# Altium PCB PCB1.PcbDoc
Units mil, origin at the board's own origin, x right, y up, seen from the top; angles counter-clockwise.
Board outline 1885.03 x 1755.03 mil, 2 copper layers (Top Layer, Bottom Layer); 24 components, 59 nets, 170 pads, 23 vias.
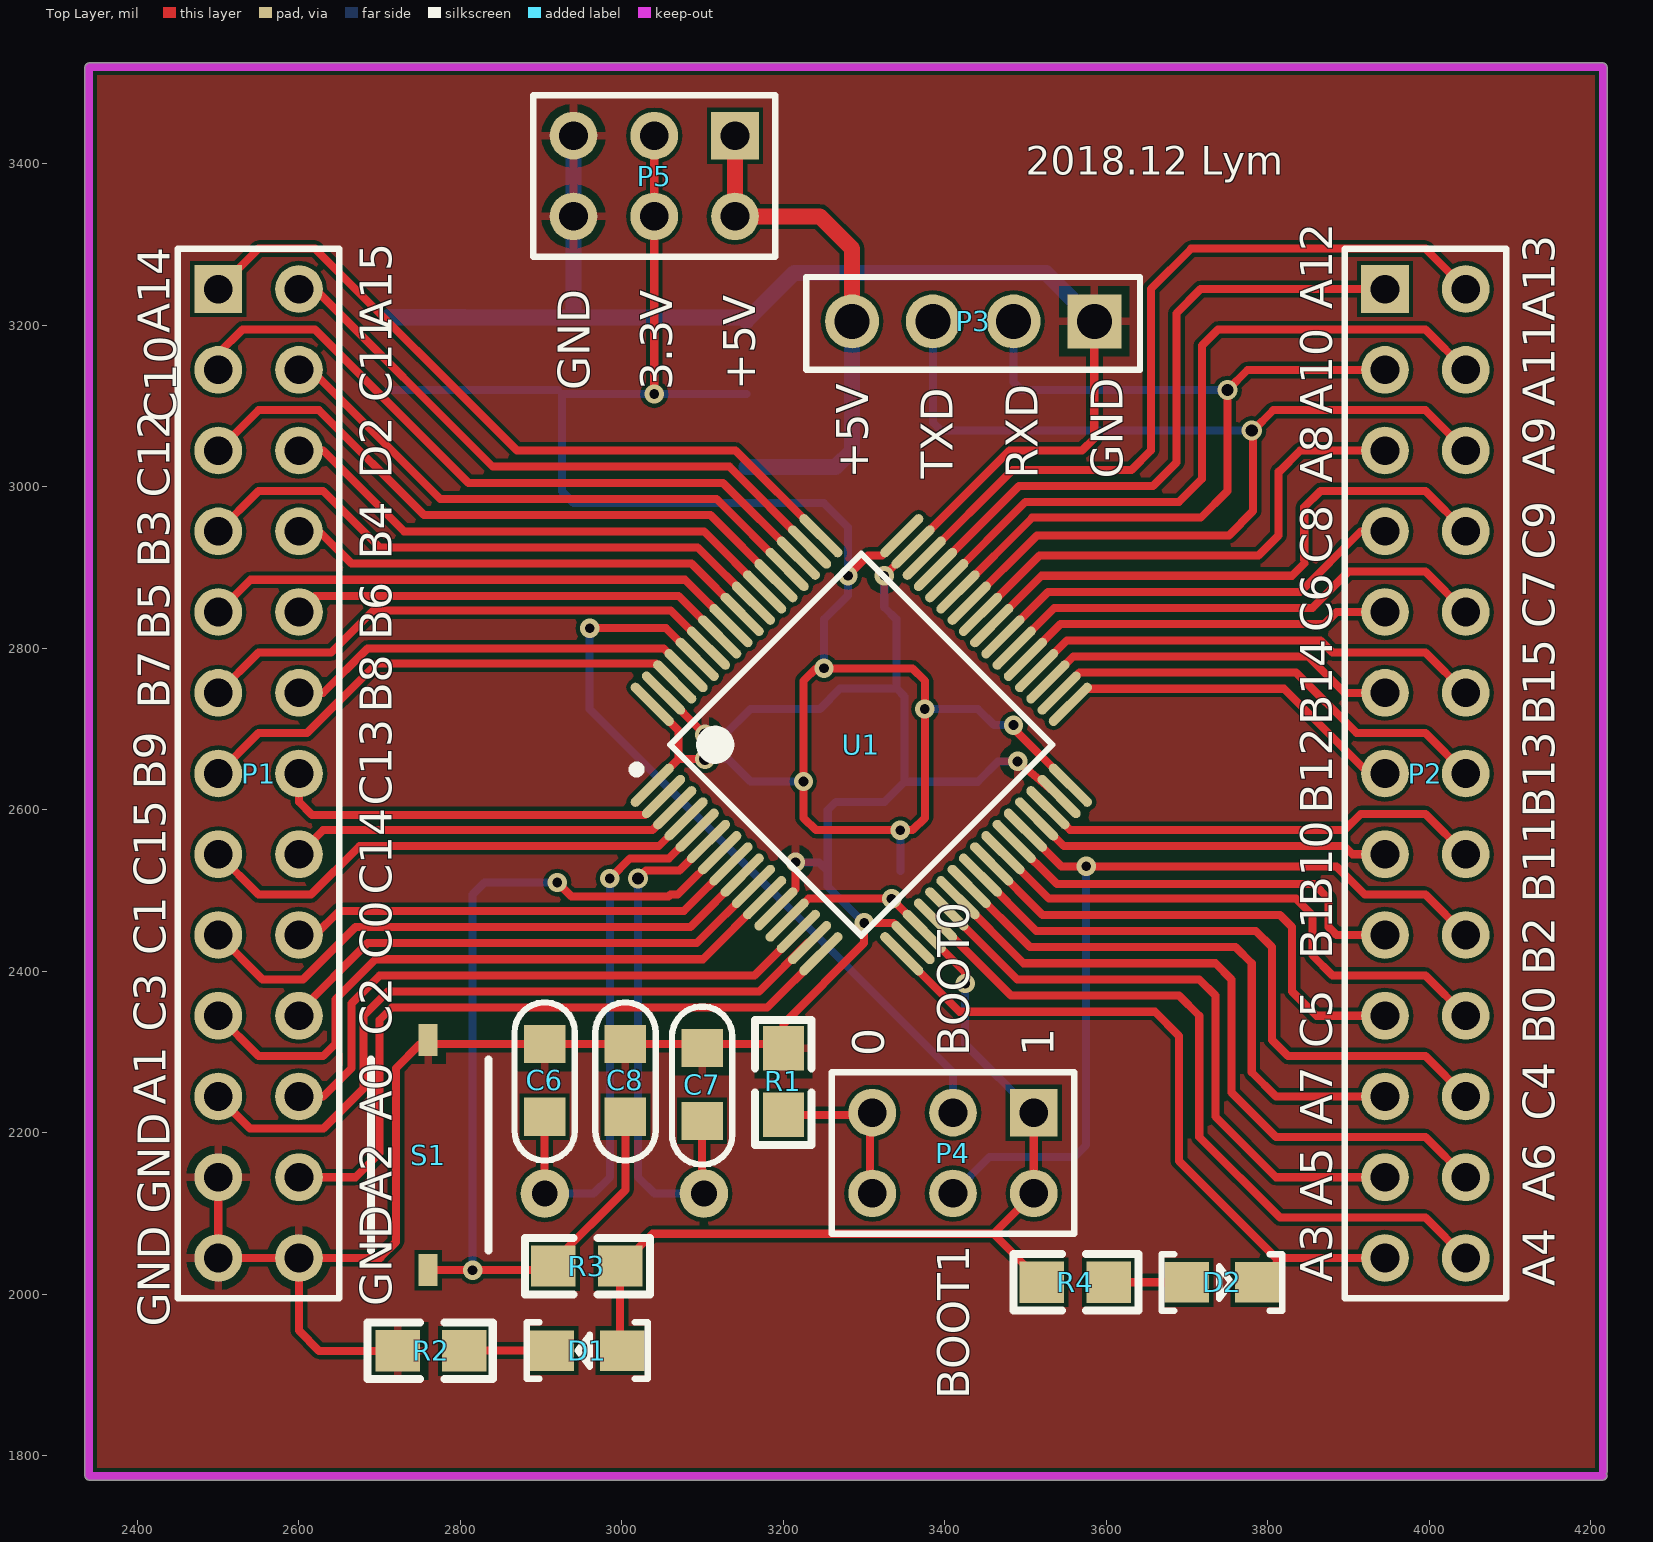
[diagram p0: Top Layer view]
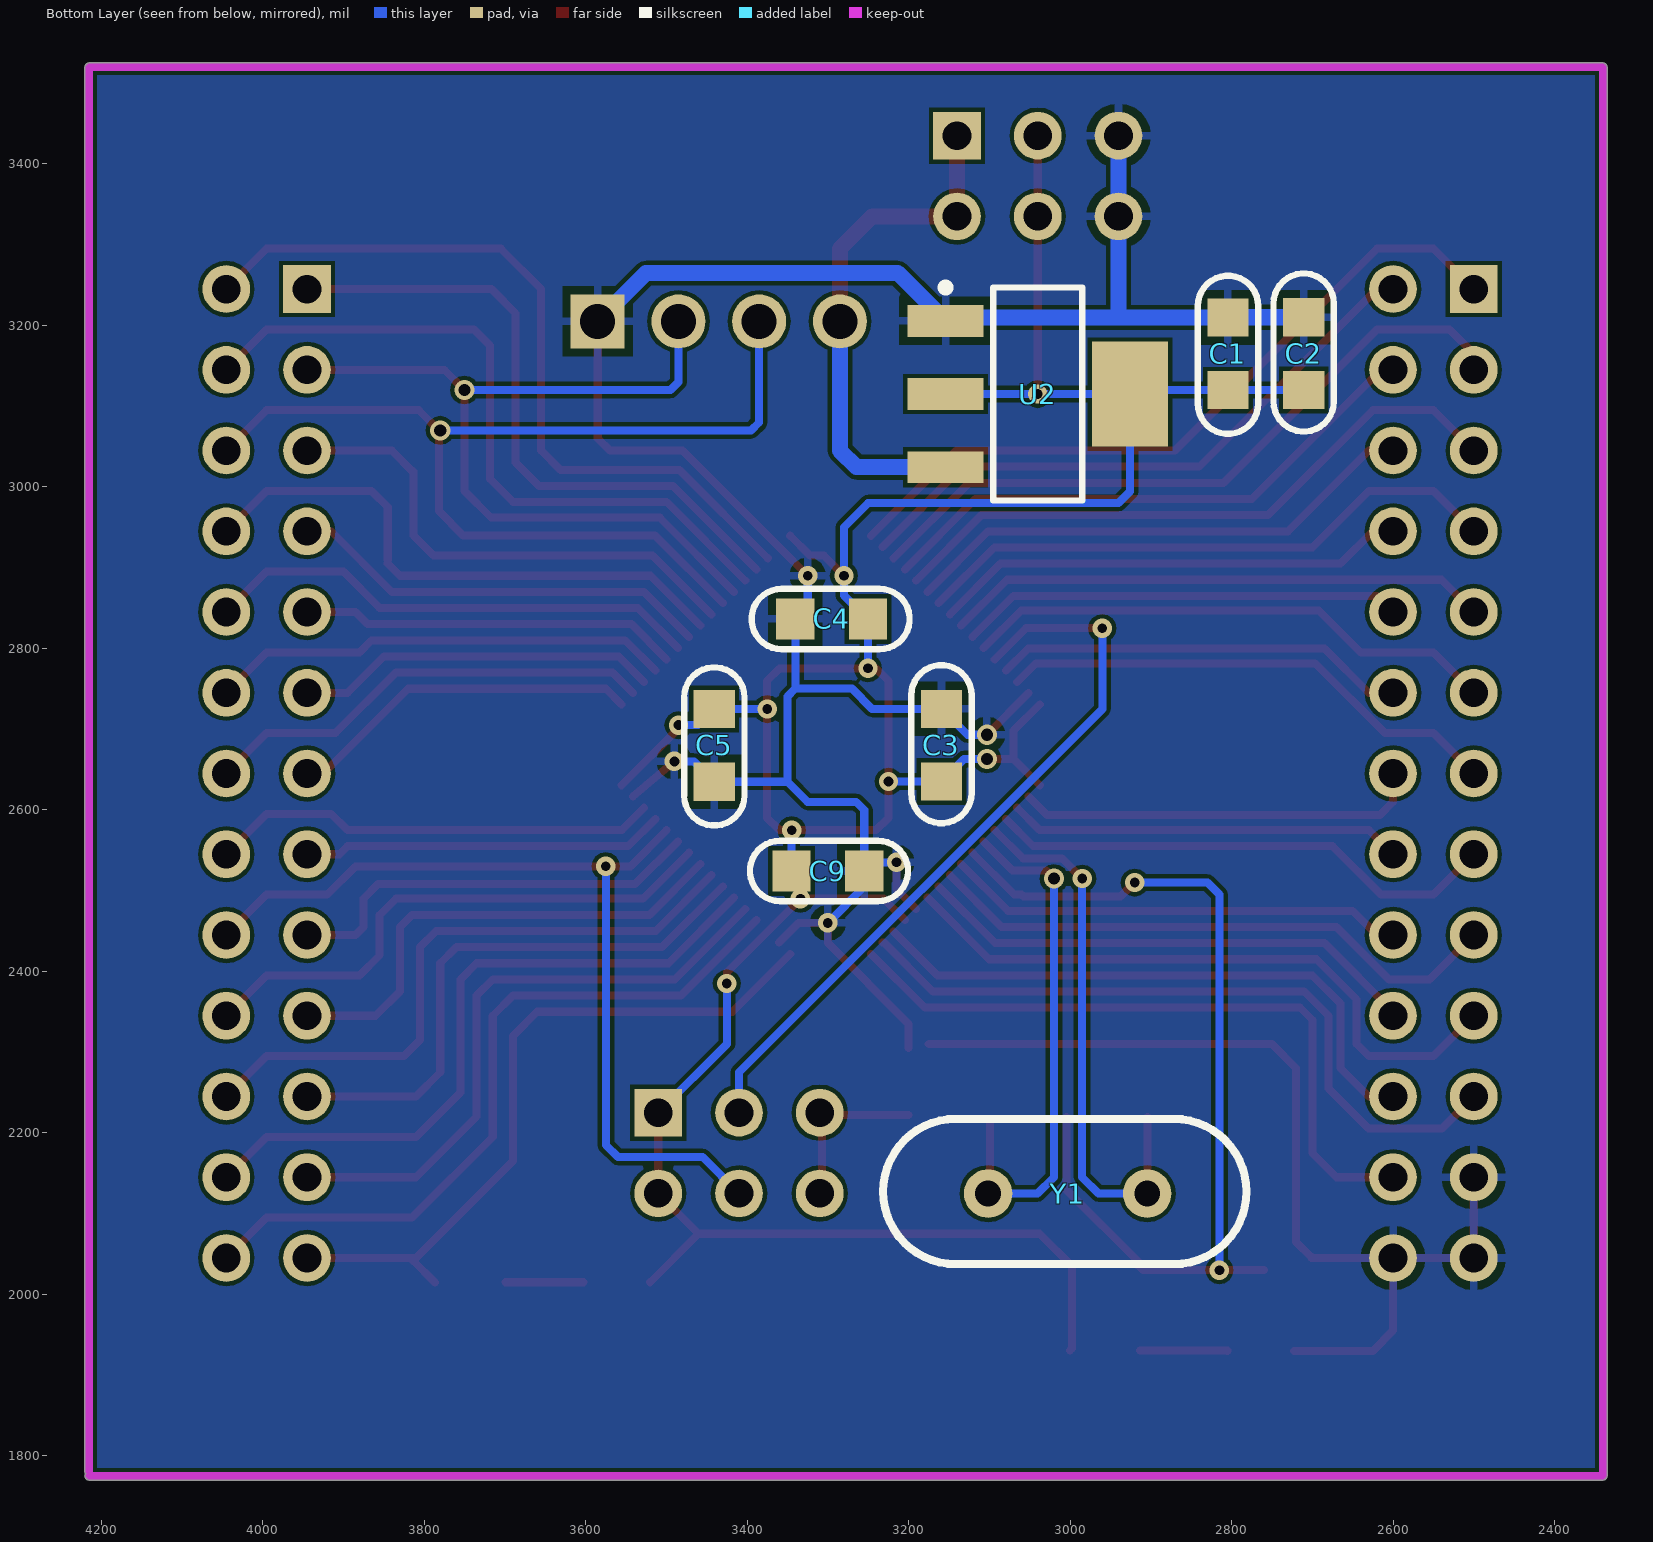
[diagram p1: Bottom Layer view, seen from below]

## Layer stack, top to bottom
Top Solder: solder mask 0.4, Solder Resist, Dk 3.5
Top Layer: signal copper 1.4
Dielectric 1: dielectric 12.6, FR-4, Dk 4.8
Bottom Layer: signal copper 1.4
Bottom Solder: solder mask 0.4, Solder Resist, Dk 3.5

## Board outline
2334.99,1775 ccw(c2340,1775) 2340,1769.98 4215,1769.98 ccw(c4215,1775) 4220.02,1775 ccw(c4215,1775) 4219.35,1777.5 ccw(c4215,1780) 4220.02,1780 4220.02,3520 ccw(c4215,3520) 4215,3525.01 2340,3525.01 ccw(c2340,3520) 2334.99,3520

## Design rules (kind name [scope] priority, off if disabled: settings)
Clearance [All] p1: gap=5 ignorepadtopadclearanceinfootprint=FALSE except(0: Arc-Hole Track-Hole SMDPad-Hole THPad-Hole Via-Hole Fill-Hole Poly-Hole Region-Hole Text-Hole)
PolygonConnect [All] p1: connectstyle=Relief reliefconductorwidth=10 reliefentries=4 polygonreliefangle="90 Angle" airgapwidth=10
RoutingVias [All] p1: holewidth=15 width=25 viastyle="Through Hole" minholewidth=10 minwidth=20 maxholewidth=20 maxwidth=30
SolderMaskExpansion [All] p1: expansion=4
Width [All] p1: maxlimit=20 minlimit=10 preferedwidth=10
30 further rules are at their usual default settings.

## Components (designator, comment, footprint, x,y, rotation, side; value= is the part's Value field where it differs from the comment)
C1 "10uF" 0805C 2803.73,3120 r180 bottom
C2 "0.1UF" 0805C 2711.27,3210 r0 bottom
C3 "0.1UF" 0805C 3160,2725 r0 bottom
C4 "0.1UF" 0805C 3340.14,2835.73 r270 bottom
C5 "0.1UF" 0805C 3440,2635 r180 bottom
C6 "22PF" 0805C 2905,2220 r0 top
C7 "22PF" 0805C 3100,2215 r0 top
C8 "0.1UF" 0805C 3005,2220 r0 top
C9 "0.1UF" 0805C 3255,2525 r90 bottom
D1 "LED" LED0805 3000,1930 r180 top
D2 "LED" LED0805 3700,2015 r0 top
P1 "Header 13X2" HDR2X13 2500,3245 r270 top
P2 "Header 13X2" HDR2X13 3945,3245 r270 top
P3 "Header 4X1" HDR1X4 3435,3205 r180 top
P4 "Header 3X2" HDR2X3 3510,2225 r180 top
P5 "Header 3X2" HDR2X3 3140,3435 r180 top
R1 "1K" 0805R 3200,2305 r270 top
R2 "1K" 0805R 2805,1930 r180 top
R3 "10K" 0805R 2915,2035 r0 top
R4 "1K" 0805R 3520,2015 r0 top
S1 "KEY" KEY_SOP_3X6X2.2MM 2760,2015 r90 top
U1 "STM32F103RBT6_1" STM-LQFP64_N 3296.46,2680.61 r45 top
U2 "REG1117_3.3" SOT223_N 3040,3115 r180 bottom
Y1 "8M" OSC2PR-1 2905,2125 r0 bottom

## Footprints (in the part's own frame and the unit in brackets; to place one, negate y for a bottom-side part, rotate by r counter-clockwise, add the part's x,y. Pads: shape width x height; smd on the part's side, far side on the other; paste and mask are expansions set on the pad)
0805C [mm]
  rect 1.3x1.2 smd: 1(-0.019,-0.004) 2(-0.019,2.282)
  silkscreen extent -0.97,-1.38 0.93,3.59
0805R [mm]
  rect 1.4x1.3 smd: 1(0,0) 2(2.1,0)
  silkscreen extent -0.89,-0.89 3.05,0.89
HDR1X4 [mm] "TO, Thru-Hole, Vertical, Heatsink Mounted; 4 In-Line Leads; Pitch 2.54 mm"
  rect 1.7x1.7 hole 1.1: 1(-3.81,0)
  round 1.7 hole 1.1: 2(-1.27,0) 3(1.27,0) 4(3.81,0)
  silkscreen extent -5.25,-1.4 5.25,1.52
HDR2X3 [mm] "Connector; Header; 3x2 Position"
  rect 1.5x1.5 hole 0.9: 1(0,0)
  round 1.5 hole 0.9: 2(0,2.54) 3(2.54,0) 4(2.54,2.54) 5(5.08,0) 6(5.08,2.54)
  silkscreen extent -1.27,-1.27 6.35,3.81
HDR2X13 [mm]
  rect 1.5x1.5 hole 0.9: 1(0,0)
  round 1.5 hole 0.9: 2(0,2.54) 3(2.54,0) 4(2.54,2.54) 5(5.08,0) 6(5.08,2.54) 7(7.62,0) 8(7.62,2.54) 9(10.16,0) 10(10.16,2.54) 11(12.7,0) 12(12.7,2.54) 13(15.24,0) 14(15.24,2.54) 15(17.78,0) 16(17.78,2.54) 17(20.32,0) 18(20.32,2.54) 19(22.86,0) 20(22.86,2.54) 21(25.4,0) 22(25.4,2.54) 23(27.94,0) 24(27.94,2.54) 25(30.48,0) 26(30.48,2.54)
  silkscreen extent -1.27,-1.27 31.75,3.81
KEY_SOP_3X6X2.2MM [mm]
  rect 1x0.6 smd: 1(0.381,0) 2(7.62,0)
  silkscreen extent 1,-1.9 7,1.8
LED0805 [mm]
  rect 1.4x1.27 smd: 1(-0.008,-0.007) 2(2.202,-0.007)
  silkscreen extent -0.81,-0.9 2.99,0.88
OSC2PR-1 [mil]
  round 60 hole 32: 1(-0.55,0.16) 2(196.45,0.16)
  silkscreen extent -124,-92 326,88
SOT223_N [mm] "SOT223, 4-Leads, Body 6.5x3.5mm, Pitch 2.3mm, Lead Span 7mm, IPC Medium Density"
  rect 2.4x1 smd: 1(-2.9,2.3) 2(-2.9,0) 3(-2.9,-2.3)
  rect 2.4x3.3 smd: 4(2.9,0)
  silkscreen extent -3.03,-3.35 1.4,3.47, body extent -1.85,-3.35 1.85,3.35, height 1.7
STM-LQFP64_N [mm] "Thin QFP, 64-Leads, Body 10x10mm, Pitch 0.5mm, IPC Medium Density"
  oval 1.8x0.3 smd: 1(-5.55,3.75) 2(-5.55,3.25) 3(-5.55,2.75) 4(-5.55,2.25) 5(-5.55,1.75) 6(-5.55,1.25) 7(-5.55,0.75) 8(-5.55,0.25) 9(-5.55,-0.25) 10(-5.55,-0.75) 11(-5.55,-1.25) 12(-5.55,-1.75) 13(-5.55,-2.25) 14(-5.55,-2.75) 15(-5.55,-3.25) 16(-5.55,-3.75) 33(5.55,-3.75) 34(5.55,-3.25) 35(5.55,-2.75) 36(5.55,-2.25) 37(5.55,-1.75) 38(5.55,-1.25) 39(5.55,-0.75) 40(5.55,-0.25) 41(5.55,0.25) 42(5.55,0.75) 43(5.55,1.25) 44(5.55,1.75) 45(5.55,2.25) 46(5.55,2.75) 47(5.55,3.25) 48(5.55,3.75)
  oval 0.3x1.8 smd: 17(-3.75,-5.55) 18(-3.25,-5.55) 19(-2.75,-5.55) 20(-2.25,-5.55) 21(-1.75,-5.55) 22(-1.25,-5.55) 23(-0.75,-5.55) 24(-0.25,-5.55) 25(0.25,-5.55) 26(0.75,-5.55) 27(1.25,-5.55) 28(1.75,-5.55) 29(2.25,-5.55) 30(2.75,-5.55) 31(3.25,-5.55) 32(3.75,-5.55) 49(3.75,5.55) 50(3.25,5.55) 51(2.75,5.55) 52(2.25,5.55) 53(1.75,5.55) 54(1.25,5.55) 55(0.75,5.55) 56(0.25,5.55) 57(-0.25,5.55) 58(-0.75,5.55) 59(-1.25,5.55) 60(-1.75,5.55) 61(-2.25,5.55) 62(-2.75,5.55) 63(-3.25,5.55) 64(-3.75,5.55)
  silkscreen extent -5.67,-4.25 4.25,4.57, body extent -5,-5 5,5, height 1.6

## Part data
C1: library part "Cap Pol", "Polarized Capacitor (Radial)"
C2 C3 C4 C5 C6 C7 C8 C9: library part Cap, "Capacitor"
P1 P2: "Header, 13-Pin, Dual row"
P3: "Header, 4-Pin, Right Angle"
P4 P5: "Header, 3-Pin, Dual row"
R1 R2 R3 R4: library part Res, "Resistor"
U1: "ARM Cortex-M3 32-bit MCU, 128 KB Flash, 20 KB Internal RAM, 51 I/Os, 64-pin LQFP, -40 to 85 degC, Tray"
U2: library part Vlot_Reg
Y1: library part XTAL, "Crystal Oscillator"

## Via types
v1: diameter 24, hole 12, Top Layer to Bottom Layer, 18 vias
v2: diameter 25, hole 15, Top Layer to Bottom Layer, 5 vias

## Nets (pads, with @x,y where several pads share a name; then routed paths per layer and width w, separated by ;. In a path a pad name is that pad's centre, name@x,y a point inside that pad or via, vN(x,y) a via of type N, cw(c..) or ccw(c..) an arc to the next point about the centre after c; other vN are vias at no path point)
+3.3: C1.1 C2.2 C3.2 C4.2 C5.2 C9.2 D1.1 P4.1 P4.2 P5.3 P5.4 R3.2 R4.1 U1.1 U1.13 U1.19 U1.32 U1.48 U1.64 U2.2 U2.4 | length 4075.9
  Top Layer w10: D1.1 2997.68,1932.89 R3.2 3037.68,2075 3460,2075 ; U1.1 3070,2662.93 ; U1.64 3070,2698.28 3070,2662.93 ; v1(3040,3115) P5.4 P5.3 ; v2(3102.93,2662.93) 3070,2662.93 ; U1.13 3231.13,2490 v1(3333.96,2490) U1.19 3425,2398.96 v1(3425,2385) ; v1(3280,2890) 3305,2915 3322.07,2915 U1.48 ; v1(3485,2705) 3485,2700.86 U1.32 ; P4.1 P4.2 3460,2075 ; R4.1 3460,2075 ; 3224.86,2590.14 v1(3224.86,2635.14) 3224.86,2759.86 3240.28,2775.28 3359.72,2775.28 3375.14,2759.86 v1(3375.14,2724.86) 3375.14,2590.14 3359.86,2574.86 v1(3344.86,2574.86) 3240.14,2574.86 3224.86,2590.14
  Bottom Layer w10: C2.2@2710.81,3119.86 C1.1 U2.4@2920.96,3119.86 ; v2(3102.93,2662.93) 3131.47,2662.93 C3.2 v1(3224.86,2635.14) ; U2.2 v1(3040,3115) U2.4 2925.83,2994.17 2940,2980 3250,2980 3280,2950 v1(3280,2890) 3280,2865.6 C4.2@3250.57,2836.17 ; v1(3250.28,2775.28) C4.2 ; C9.2 v1(3344.86,2574.86) ; v1(3375.14,2724.86) C5.2 3460.6,2705 v1(3485,2705) ; v1(3425,2385) 3425,2310 P4.1
+5: P3.4 P5.1 P5.2 U2.3 | length 650.9
  Top Layer w20: P5.1 P5.2 3245,3335 3285,3295 P3.4
  Bottom Layer w20: U2.3 3264.45,3024.45 3285,3045 P3.4
BOOT0: P4.3 U1.60 | length 935.6
  Top Layer w10: v1(2960,2825) 3054.64,2825 U1.60
  Bottom Layer w10: v1(2960,2825) 2960,2725 3410,2275 P4.3
BOOT1: P2.18 P4.4 U1.28 | length 1133.9
  Top Layer w10: U1.28 3544.51,2530 v1(3575,2530) 3885,2530 3920,2495 3995,2495 P2.18
  Bottom Layer w10: P4.4 3455,2170 3560,2170 3575,2185 v1(3575,2530)
GND: C1.2 C2.1 C3.1 C4.1 C5.1 C6.2 C7.2 C8.2 C9.1 P1.23 P1.25 P1.26 P3.1 P5.5 P5.6 R1.1 R2.2 S1.2 U1.12 U1.18 U1.31 U1.47 U1.63 U2.1 | length 4326.3
  Top Layer w10: P1.23 P1.25 P1.26 ; R2.2 2625,1930 2600,1955 P1.26 ; U1.63 v2(3103.06,2693.06) ; R1.1@3175,2310 2750,2310 2720,2280 2720,2065 2700.87,2045.87 2700,2045.87 2700.87,2045 P1.26 ; U1.12 3215,2501.71 v1(3215,2535) ; R1.1 3200,2335 3300,2435 v1(3300,2460) 3336.12,2460 U1.18 ; v1(3324.91,2890) U1.47 3479.91,3045 3570,3045 3585,3060 P3.1 ; v1(3490,2660) U1.31
  Bottom Layer w10: v2(3103.06,2693.06) 3127.19,2693.06 C3.1 3245.14,2725.14 3270.28,2750.28 3340.28,2750.28 ; U2.1@3149.86,3209.86 U2.1 ; v1(3215,2535) 3244.13,2535 C9.1 ; v1(3300,2460) 3254.86,2505.14 C9.1 ; v1(3324.91,2890) 3324.91,2850.97 C4.1@3340.14,2835.73 ; C4.1 3340.28,2750.28 ; v1(3490,2660) 3465.87,2660 C5.1 3350.14,2634.86 ; C9.1 3254.86,2599.86 3265,2610 3325.28,2610 3350.14,2634.86 ; 3340.28,2750.28 3350.14,2740.41 3350.14,2634.86
  Bottom Layer w20: C2.1 C1.2@2804.19,3210.14 ; C1.2 2940,3209.86 ; P5.5 P5.6 2940,3209.86 ; U2.1@3149.86,3209.86 2940,3209.86 ; U2.1 3213.62,3265 3525,3265 P3.1
NetD1_2: D1.2 R2.1 | length 108.4
  Top Layer w10: R2.1 2805.26,1930.26 D1.2
NetD2_1: D2.1 R4.2 | length 96.8
  Top Layer w10: R4.2 D2.1@3699.43,2015
NetP4_5: P4.5 P4.6 R1.2 | length 202
  Top Layer w10: R1.2 3307.32,2222.32 P4.6@3307.32,2127.68
NRST: C8.1 R3.1 S1.1 U1.7 | length 1186
  Top Layer w10: S1.1 v1(2815,2030) 2910,2030 R3.1 2915,2040 3004.27,2129.27 C8.1 ; v1(2920,2510) 2937.5,2492.5 3057.5,2492.5 3060,2495 3069.1,2495 U1.7
  Bottom Layer w10: v1(2815,2030) 2815,2495 2830,2510 v1(2920,2510)
OSC_IN: C6.1 U1.5 Y1.1 | length 682
  Top Layer w10: C6.1 2904.27,2130.02 Y1.1@2904.45,2129.84 ; v1(2985,2515) 3010,2540 3058.42,2540 U1.5
  Bottom Layer w10: Y1.1 2964.84,2124.84 2985,2145 v1(2985,2515)
OSC_OUT: C7.1 U1.6 Y1.2 | length 653.8
  Top Layer w10: v2(3020,2515) 3030,2525 3071.26,2525 U1.6 ; Y1.2@3099.27,2127.02 C7.1
  Bottom Layer w10: v2(3020,2515) 3020,2145 3040.16,2124.84 Y1.2
PA0: P1.22 U1.14 | length 750.1
  Top Layer w10: P1.22 2630,2245 2665,2280 2665,2360 2700,2395 3163.97,2395 U1.14
PA1: P1.21 U1.15 | length 896.9
  Top Layer w10: P1.21 2539.53,2205.47 2630.47,2205.47 2680,2255 2680,2345 2710,2375 3170,2375 3230.62,2435.62 U1.15
PA2: P1.24 U1.16 | length 857.6
  Top Layer w10: P1.24 2670,2145 2700,2175 2700,2340 2715,2355 3179.65,2355 U1.16
PA3: D2.2 P2.25 U1.17 | length 883.1
  Top Layer w10: U1.17 3418.28,2350 3660,2350 3690,2320 3690,2165 3810,2045 P2.25 ; D2.2 3813.48,2041.52
PA4: P2.26 U1.20 | length 917.9
  Top Layer w10: U1.20 3481.8,2370 3690,2370 3715,2345 3715,2195 3815,2095 3995,2095 P2.26
PA5: P2.23 U1.21 | length 768.3
  Top Layer w10: U1.21 3489.64,2390 3715,2390 3735,2370 3735,2220 3810,2145 P2.23
PA6: P2.24 U1.22 | length 854.3
  Top Layer w10: U1.22 3497.47,2410 3735,2410 3755,2390 3755,2250 3810,2195 3995,2195 P2.24
PA7: P2.21 U1.23 | length 701.8
  Top Layer w10: U1.23 3505.31,2430 3760,2430 3780,2410 3780,2275 3810,2245 P2.21
PA8: P2.5 U1.41 | length 630.6
  Top Layer w10: U1.41 3516.94,2915 3788.33,2915 3813.33,2940 3813.33,3019.17 ; 3814.17,3019.17 3840,3045 P2.5
PA9: P2.6 P3.3 U1.42 | length 1321.5
  Top Layer w10: U1.42 3514.1,2940 3751.67,2940 3781.67,2970 3781.67,3070 3806.67,3095 3995,3095 P2.6
  Bottom Layer w10: P3.3@3375,3205 3385,3195 3385,3080 3395,3070 v2(3780,3070)
PA10: P2.3 P3.2 U1.43 | length 1064.3
  Top Layer w10: U1.43 3508.11,2961.85 3716.85,2961.85 3750,2995 v2(3750,3120) 3775,3145 P2.3
  Bottom Layer w10: P3.2@3475,3205 3485,3195 3485,3130 3495,3120 v2(3750,3120)
PA11: P2.4 U1.44 | length 889
  Top Layer w10: U1.44 3499.96,2981.54 3689.87,2981.54 3718.33,3010 3718.33,3175 3738.33,3195 3995,3195 P2.4
PA12: P2.1 U1.45 | length 808.9
  Top Layer w10: U1.45 3491.8,3001.22 3657.89,3001.22 3686.67,3030 3686.67,3215 3716.67,3245 P2.1
PA13: P2.2 U1.46 | length 967.2
  Top Layer w10: U1.46 3483.65,3020.91 3630.91,3020.91 3655,3045 3655,3245 3705,3295 3995,3295 P2.2
PA14: P1.1 U1.49 | length 914.3
  Top Layer w10: P1.1 2550,3295 2620,3295 2870,3045 3140.86,3045 U1.49
PA15: P1.2 U1.50 | length 764.7
  Top Layer w10: P1.2 2620,3245 2840,3025 3133.02,3025 U1.50
PB0: P2.20 U1.26 | length 686.1
  Top Layer w10: U1.26 3528.83,2490 3835,2490 3855,2470 3855,2420 3880,2395 3995,2395 P2.20
PB1: P2.17 U1.27 | length 527.7
  Top Layer w10: U1.27 3538.67,2508 3857,2508 3875,2490 3875,2455 3885,2445 P2.17
PB3: P1.7 U1.55 | length 741.1
  Top Layer w10: P1.7 2550,2995 2630,2995 2700,2925 3093.83,2925 U1.55
PB4: P1.8 U1.56 | length 591.6
  Top Layer w10: P1.8 2625,2945 2665,2905 3085.99,2905 U1.56
PB5: P1.9 U1.57 | length 675.1
  Top Layer w10: P1.9 2540,2885 3078.15,2885 U1.57
PB6: P1.10 U1.58 | length 550.4
  Top Layer w10: P1.10 2620,2865 3070.31,2865 U1.58
PB7: P1.11 U1.59 | length 668.7
  Top Layer w10: P1.11 2550,2795 2640,2795 2692,2847 3060.47,2847 U1.59
PB8: P1.12 U1.61 | length 513.5
  Top Layer w10: P1.12 2630,2745 2685,2800 3051.8,2800 U1.61
PB9: P1.13 U1.62 | length 631.4
  Top Layer w10: P1.13 2550,2695 2610,2695 2696.42,2781.42 3042.54,2781.42 U1.62
PB10: P2.15 U1.29 | length 449.5
  Top Layer w10: U1.29 3547.35,2555 3895,2555 3905,2545 P2.15
PB11: P2.16 U1.30 | length 557.9
  Top Layer w10: U1.30 3555.18,2575 3895,2575 3915,2595 3995,2595 P2.16
PB12: P2.13 U1.33 | length 441.1
  Top Layer w10: U1.33 3574.65,2750 3820,2750 3925,2645 P2.13
PB13: P2.14 U1.34 | length 565.8
  Top Layer w10: U1.34 3566.81,2770 3835,2770 3910,2695 3995,2695 P2.14
PB14: P2.11 U1.35 | length 449.1
  Top Layer w10: U1.35 3558.97,2790 3850,2790 3895,2745 P2.11
PB15: P2.12 U1.36 | length 573.9
  Top Layer w10: U1.36 3551.13,2810 3865,2810 3880,2795 3995,2795 P2.12
PC0: P1.18 U1.8 | length 571.5
  Top Layer w10: P1.18 2620,2445 2650,2475 3076.94,2475 U1.8
PC1: P1.17 U1.9 | length 725.2
  Top Layer w10: P1.17 2555,2390 2605,2390 2670,2455 3084.78,2455 U1.9
PC2: P1.20 U1.10 | length 632.1
  Top Layer w10: P1.20 2600,2350 2685,2435 3092.62,2435 U1.10
PC3: P1.19 U1.11 | length 811
  Top Layer w10: P1.19 2550,2295 2630,2295 2645,2310 2645,2365 2695,2415 3100.45,2415 U1.11
PC4: P2.22 U1.24 | length 781.9
  Top Layer w10: U1.24 3513.15,2450 3785,2450 3805,2430 3805,2315 3825,2295 3995,2295 P2.22
PC5: P2.19 U1.25 | length 611.8
  Top Layer w10: U1.25 3520.99,2470 3815,2470 3830,2455 3830,2375 3860,2345 P2.19
PC6: P2.9 U1.37 | length 469.6
  Top Layer w10: U1.37 3543.29,2830 3870,2830 3885,2845 P2.9
PC7: P2.10 U1.38 | length 619.2
  Top Layer w10: U1.38 3535.45,2850 3855,2850 3900,2895 3995,2895 P2.10
PC8: P2.7 U1.39 | length 527.3
  Top Layer w10: U1.39 3527.62,2870 3840,2870 3915,2945 P2.7
PC9: P2.8 U1.40 | length 712.9
  Top Layer w10: U1.40 3519.78,2890 3830,2890 3845,2905 ; 3845,2910 3845,2975 3865,2995 3995,2995 P2.8
PC10: P1.3 U1.51 | length 868.3
  Top Layer w10: P1.3 2500,3165 2530,3195 2620,3195 2810,3005 3125.18,3005 U1.51
PC11: P1.4 U1.52 | length 707
  Top Layer w10: P1.4 2615,3145 2775,2985 3117.35,2985 U1.52
PC12: P1.5 U1.53 | length 798.9
  Top Layer w10: P1.5 2550,3095 2625,3095 2755,2965 3109.51,2965 U1.53
PC13: P1.14 U1.2 | length 502.7
  Top Layer w10: P1.14 2600,2610 2616.29,2593.71 3028.62,2593.71 U1.2
PC14: P1.16 U1.3 | length 489.3
  Top Layer w10: P1.16 2630,2575 3037.74,2575 U1.3
PC15: P1.15 U1.4 | length 638.9
  Top Layer w10: P1.15 2550,2495 2615,2495 2675,2555 3045.58,2555 U1.4
PD2: P1.6 U1.54 | length 649.3
  Top Layer w10: P1.6 2630,3045 2730,2945 3101.67,2945 U1.54

## Polygon pours and split planes (outlines as drawn)
GND on Top Layer "Top Layer-No Net" (solid, pour order 6): 2345,3515 2345,1780 4210,1780 4210,3515
GND on Bottom Layer "Top Layer-No Net" (solid, pour order 8): 2350,3510 2350,1785 4205,1785 4205,3510

## Keep-outs
Keep-Out Layer:
  lines w10: 4215,1775 2340,1775 2340,3520 4215,3520 4215,1780

## Silkscreen, mask and mechanical layers (free items; w line width, h text height)
Top Overlay:
  text "2018.12 Lym" at 3500,3375 h60
  text "A12" at 3880,3220 h40 r90
  text "A13" at 4155,3205 h40 r90
  text "A15" at 2715,3195 h40 r90
  text "A14" at 2440,3190 h40 r90
  text "GND" at 2960,3120 h40 r90
  text "3.3V" at 3062.5,3120 h40 r90
  text "+5V" at 3165,3120 h40 r90
  text "C11" at 2715,3105 h40 r90
  text "A11" at 4155,3100 h40 r90
  text "A10" at 3880,3090 h40 r90
  text "C10" at 2448,3080.33 h40 r90
  text "A9" at 4155,3015 h40 r90
  text "D2" at 2715,3010 h40 r90
  text "+5V" at 3305,3010 h40 r90
  text "TXD" at 3410,3010 h40 r90
  text "RXD" at 3515,3010 h40 r90
  text "GND" at 3620,3010 h40 r90
  text "A8" at 3880,3005 h40 r90
  text "C12" at 2440,2986.67 h40 r90
  text "B4" at 2715,2910 h40 r90
  text "C9" at 4155,2910 h40 r90
  text "C8" at 3880,2905 h40 r90
  text "B3" at 2440,2900 h40 r90
  text "C7" at 4155,2825 h40 r90
  text "C6" at 3880,2820 h40 r90
  text "B5" at 2440,2810 h40 r90
  text "B6" at 2715,2810 h40 r90
  text "B7" at 2440,2725 h40 r90
  text "B8" at 2715,2720 h40 r90
  text "B14" at 3880,2705 h40 r90
  text "B15" at 4155,2705 h40 r90
  text "B9" at 2435,2625 h40 r90
  text "C13" at 2715,2605 h40 r90
  text "B12" at 3880,2595 h40 r90
  text "B13" at 4155,2590 h40 r90
  text "C15" at 2435,2505 h40 r90
  text "C14" at 2715,2495 h40 r90
  text "B11" at 4155,2485 h40 r90
  text "B10" at 3880,2480 h40 r90
  text "C1" at 2435,2420 h40 r90
  text "C0" at 2715,2415 h40 r90
  text "B1" at 3880,2415 h40 r90
  text "B2" at 4155,2395 h40 r90
  text "C3" at 2435,2325 h40 r90
  text "C2" at 2715,2320 h40 r90
  text "B0" at 4155,2310 h40 r90
  text "C5" at 3880,2305 h40 r90
  text "0" at 3325,2295 h40 r90
  text "BOOT0" at 3430,2295 h40 r90
  text "1" at 3535,2295 h40 r90
  text "A1" at 2435,2235 h40 r90
  text "A0" at 2715,2215 h40 r90
  text "C4" at 4155,2215 h40 r90
  text "A7" at 3880,2210 h40 r90
  text "A2" at 2715,2115 h40 r90
  text "A6" at 4155,2115 h40 r90
  text "A5" at 3880,2110 h40 r90
  text "GND" at 2440,2100 h40 r90
  text "A3" at 3880,2015 h40 r90
  text "A4" at 4155,2010 h40 r90
  text "GND" at 2715,1985 h40 r90
  text "GND" at 2440,1960 h40 r90
  text "BOOT1" at 3430,1870 h40 r90